# EAGLE board ct-Motor (EAGLE 4.15)
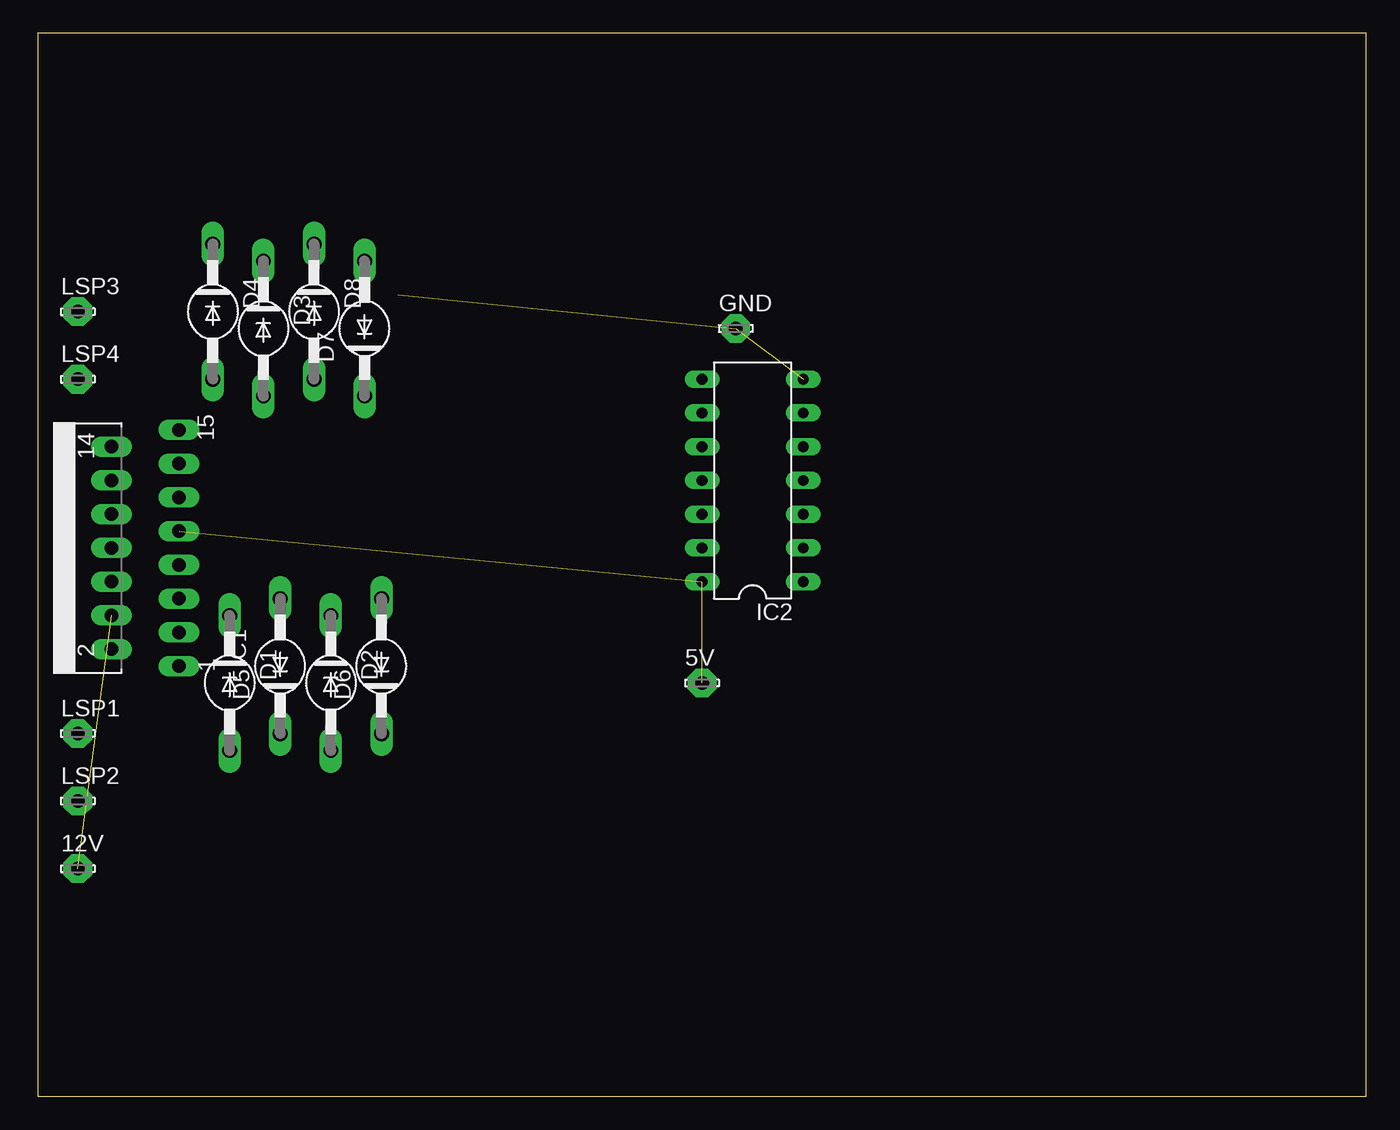
[diagram p0: board, top side]
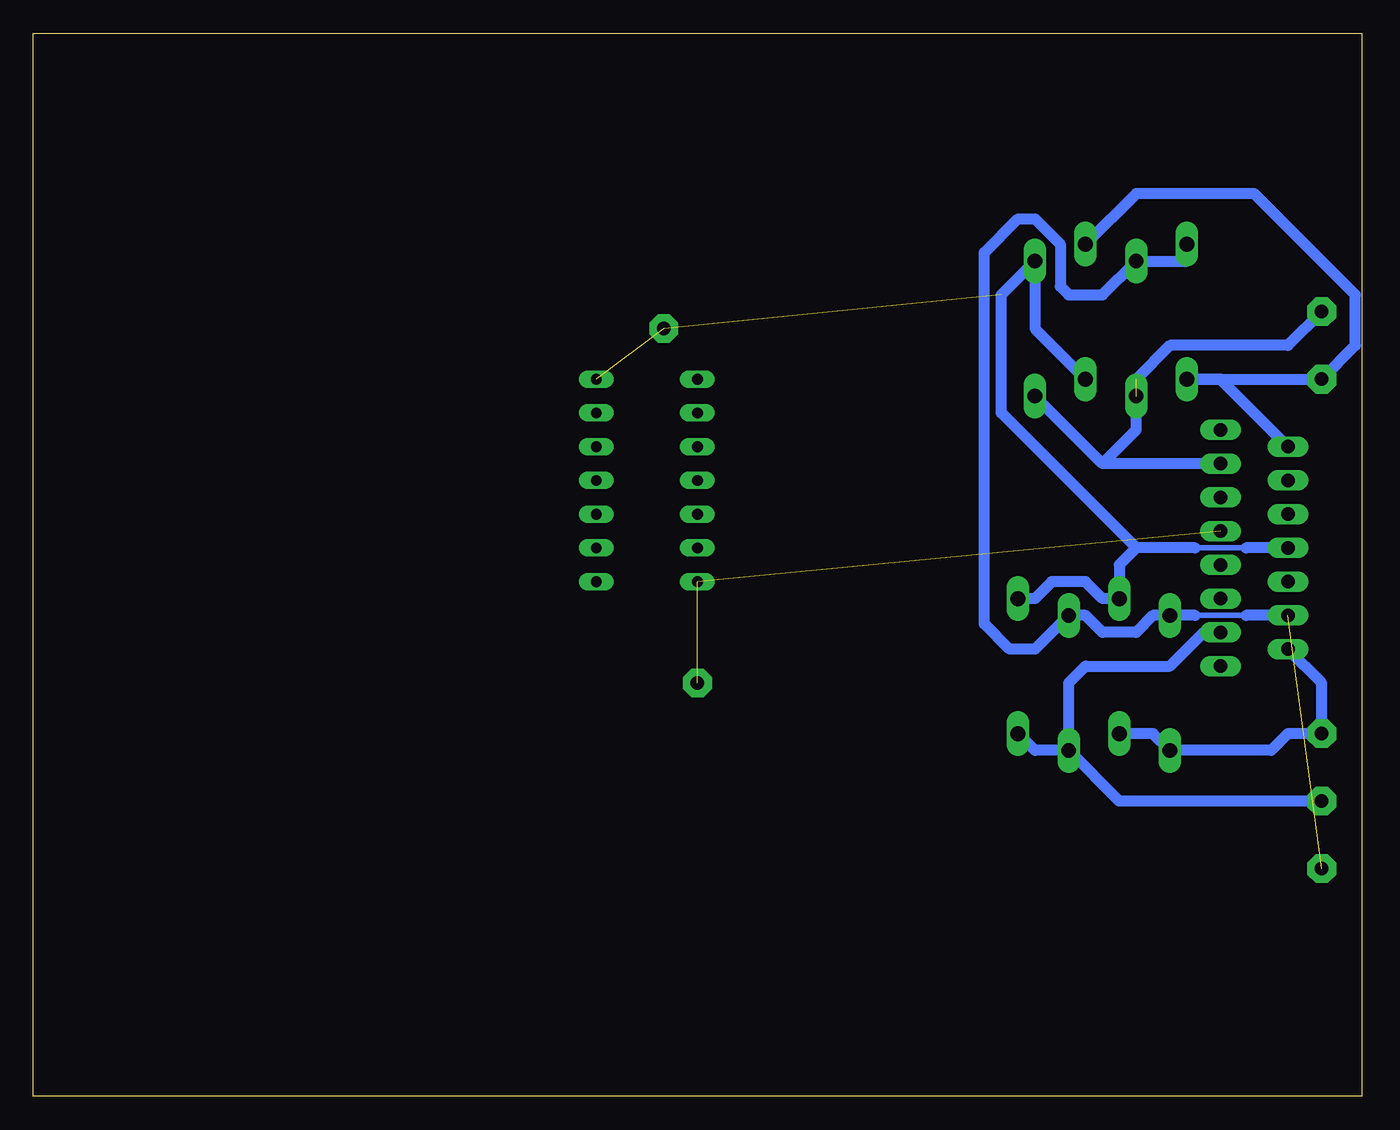
[diagram p1: board, bottom side, seen from below]

Size 100 x 80 mm. Coordinates in mm from the lower left corner, seen from the top.
Outline: 0,0 100,0 100,80 0,80 0,0
Copper layers (1*16): Top 0.035mm / dielectric 1.5mm / Bottom 0.035mm
Design rules "default": minimum track width 10mil, minimum drill 24mil, track to track 8mil, track to pad 8mil, pad to pad 8mil, via to via 8mil, smd to smd 8mil, copper to edge 40mil, drill to drill 8mil, minimum pad ring 10mil, minimum via ring 8mil, stop-mask expansion 4mil, vias tented up to drill 0mil, thermal gap 10mil

## Footprints (pad centres in the part's own frame; a part is rotated, then mirrored left to right if it is on the bottom)
LSP10 = drill 1.016 pad 2.159 octagon: MP 0,0
SGA-10 = drill 1.118 long: A 5.08,0; C -5.08,0
MULTIWATT-15 = drill 1.016 long: 1 -8.89,-7.62; 2 -7.62,-2.54; 3 -6.35,-7.62; 4 -5.08,-2.54; 5 -3.81,-7.62; 6 -2.54,-2.54; 7 -1.27,-7.62; 8 0,-2.54; 9 1.27,-7.62; 10 2.54,-2.54; 11 3.81,-7.62; 12 5.08,-2.54; 13 6.35,-7.62; 14 7.62,-2.54; 15 8.89,-7.62
DIL14 = drill 0.813 long: 1 -7.62,-3.81; 2 -5.08,-3.81; 3 -2.54,-3.81; 4 0,-3.81; 5 2.54,-3.81; 6 5.08,-3.81; 7 7.62,-3.81; 8 7.62,3.81; 9 5.08,3.81; 10 2.54,3.81; 11 0,3.81; 12 -2.54,3.81; 13 -5.08,3.81; 14 -7.62,3.81

## Placement (x,y rotation side)
5V  LSP10  [LSP10]  50,31.11 0 top
12V  LSP10  [LSP10]  3.01,17.14 0 top
D1  BYT52  [SGA-10]  14.44,31.11 270 top
D2  BYT52  [SGA-10]  22.06,31.11 270 top
D3  BYT52  [SGA-10]  16.98,57.78 270 top
D4  BYT52  [SGA-10]  13.17,59.05 270 top
D5  BYT52  [SGA-10]  18.25,32.38 90 top
D6  BYT52  [SGA-10]  25.87,32.38 90 top
D7  BYT52  [SGA-10]  24.6,57.78 90 top
D8  BYT52  [SGA-10]  20.79,59.05 270 top
GND  LSP10  [LSP10]  52.54,57.78 0 top
IC1  L298  [MULTIWATT-15]  3.01,41.27 90 top
IC2  74HC14N  [DIL14]  53.81,46.35 90 top
LSP1  LSP10  [LSP10]  3.01,27.3 0 top
LSP2  LSP10  [LSP10]  3.01,22.22 0 top
LSP3  LSP10  [LSP10]  3.01,59.05 0 top
LSP4  LSP10  [LSP10]  3.01,53.97 0 top

## Library data of the parts
5V 12V GND LSP1-LSP4 = solpad
D1-D8 = diode
IC1 = st-microelectronics
IC2 = 74xx-eu

## Nets
+12V: 12V.MP D1.C D2.C D3.C D4.C IC1.4
GND: D5.A D6.A D7.A D8.A GND.MP IC1.8 IC2.7
N$1: D1.A D5.C IC1.2 LSP1.MP
N$2: IC1.7
N$3: D2.A D6.C IC1.3 LSP2.MP
N$4: IC1.12
N$5: D3.A D7.C IC1.13 LSP3.MP
N$6: D4.A D8.C IC1.14 LSP4.MP
PC6: IC1.5
PC7: IC1.10
PWM1A: IC1.6
VCC: 5V.MP IC1.9 IC2.14

## Tracks (layer width: path | path; a pad name or v marks a point on that pad's centre or on a via)
+12V  (1 unrouted)
  Bottom 0.406: 8.73,36.19 12.54,36.19
  Bottom 0.813: IC1.4 8.73,36.19 | 12.54,36.19 D1.C 15.71,36.19 16.98,34.92 19.52,34.92 20.79,36.19 D2.C 24.6,33.65 26.5,33.65 28.41,35.55 28.41,63.5 25.87,66.03 24.6,66.03 22.7,64.13 22.7,60.96 22.06,60.32 19.52,60.32 D3.C 13.17,62.86 D4.C
GND  (2 unrouted)
  Bottom 0.406: 8.73,41.27 12.54,41.27
  Bottom 0.813: 16.98,41.27 18.25,40 D5.A 19.52,37.46 20.79,38.73 23.33,38.73 24.6,37.46 D6.A | 12.54,41.27 16.98,41.27 | IC1.8 8.73,41.27 | D8.A 24.6,57.78 D7.A 27.14,60.32 27.14,51.43 16.98,41.27
N$1
  Bottom 0.813: D5.C 15.71,27.3 D1.A 6.82,26.03 5.55,27.3 LSP1.MP 3.01,31.11 IC1.2
N$3
  Bottom 0.813: IC1.3 11.9,34.92 14.44,32.38 20.79,32.38 22.06,31.11 D2.A | LSP2.MP 18.25,22.22 D2.A | D2.A 24.6,26.03 D6.C
N$5  (1 unrouted)
  Bottom 0.813: 19.52,47.62 D7.C | IC1.13 19.52,47.62 | 19.52,47.62 16.98,50.16 D3.A | LSP3.MP 5.55,56.51 14.44,56.51 16.98,53.97
N$6
  Bottom 0.813: D8.C 16.98,67.94 8.09,67.94 0.47,60.32 0.47,56.51 LSP4.MP D4.A 10.63,53.97 IC1.14
VCC  (2 unrouted)